# EAGLE board main (EAGLE 9.6.2)
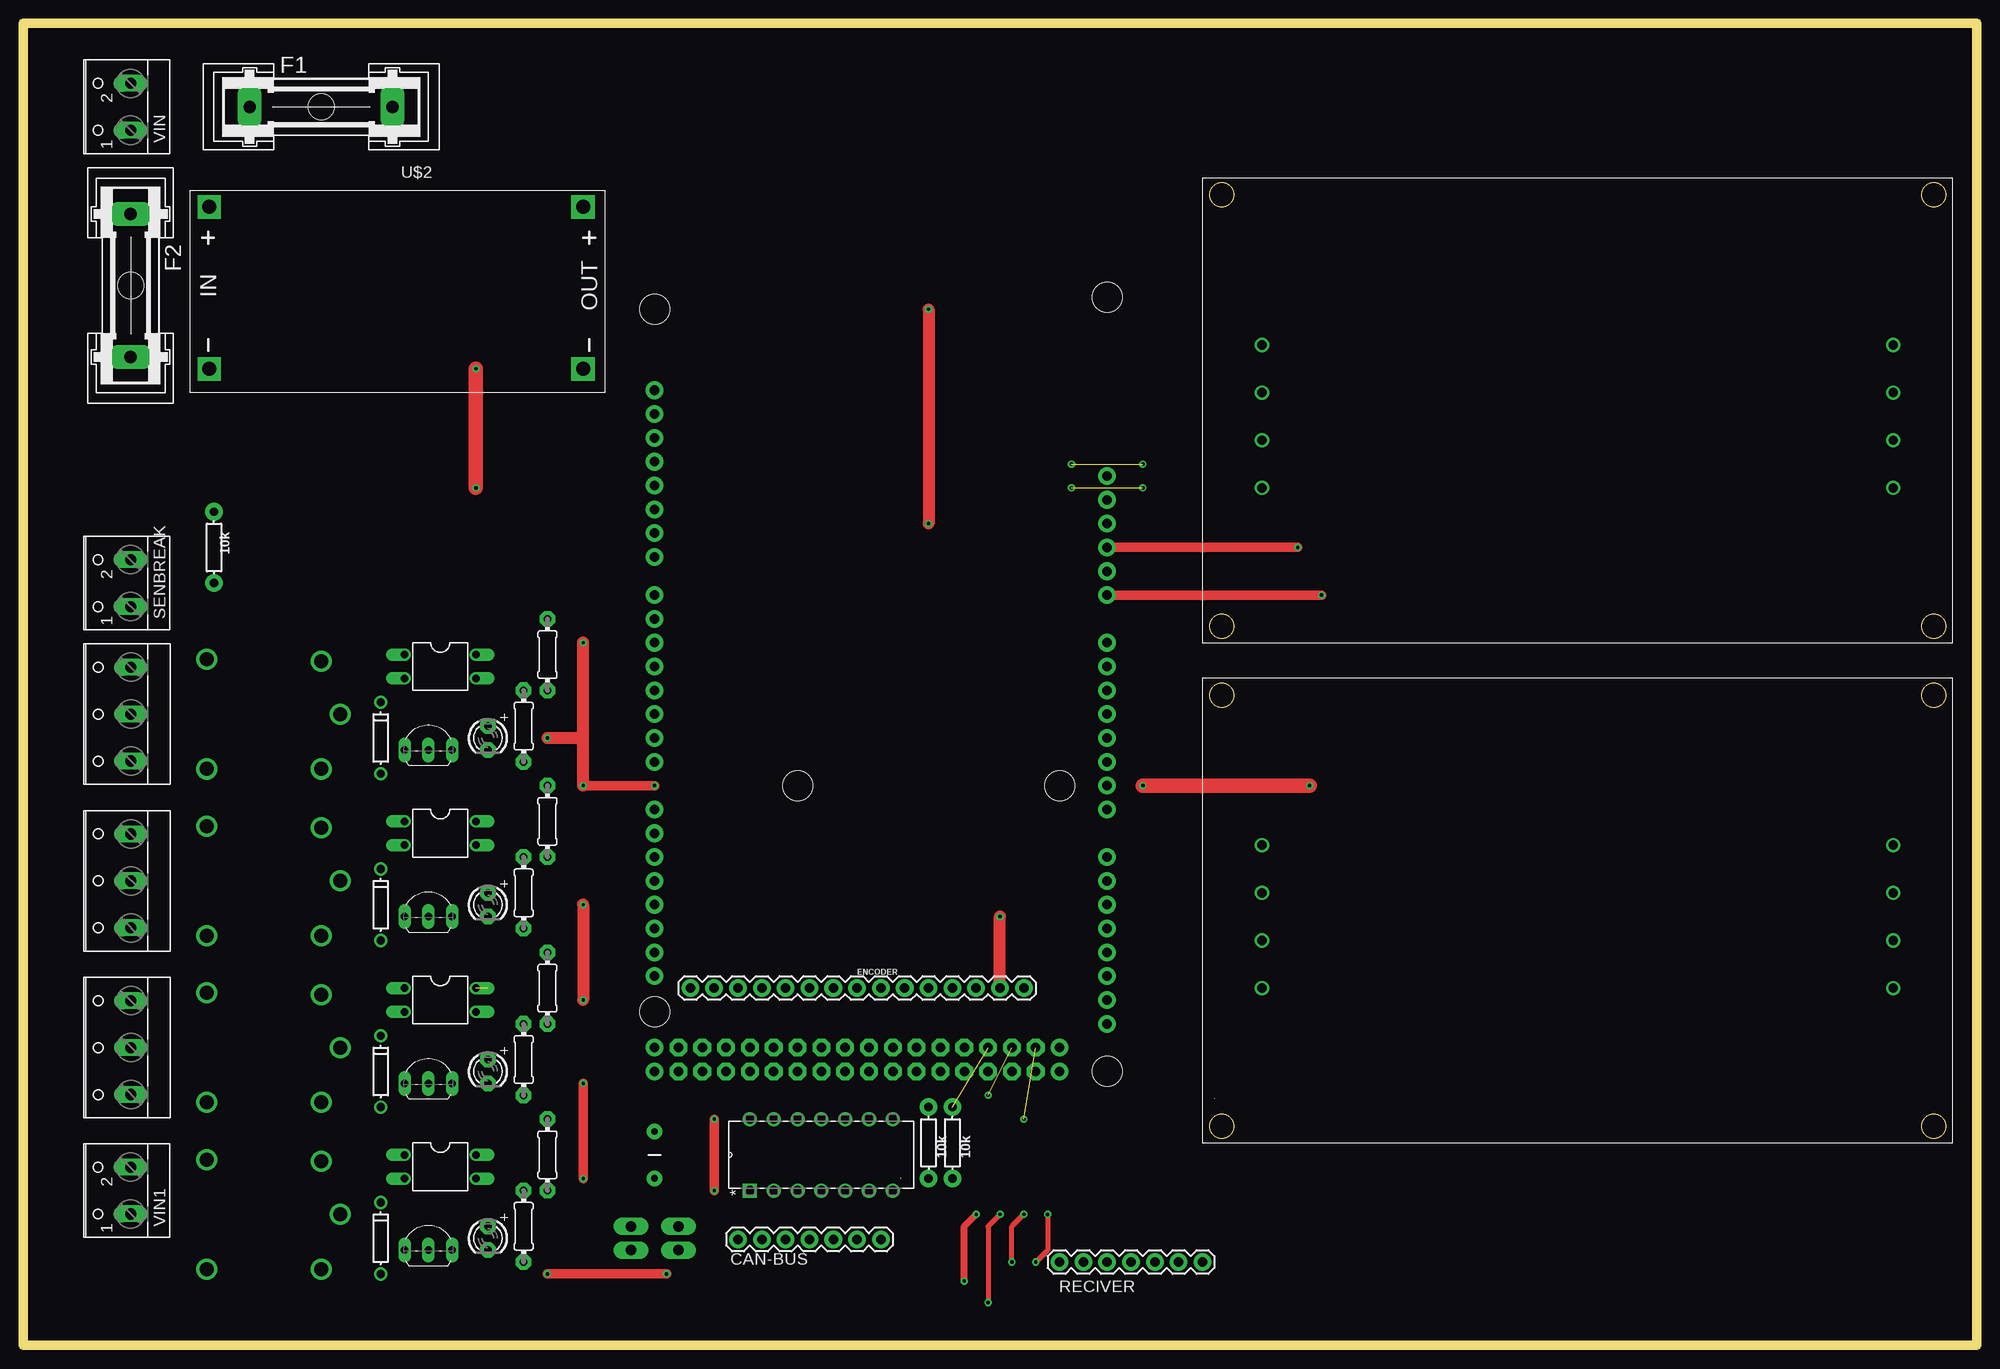
[diagram p0: board, top side]
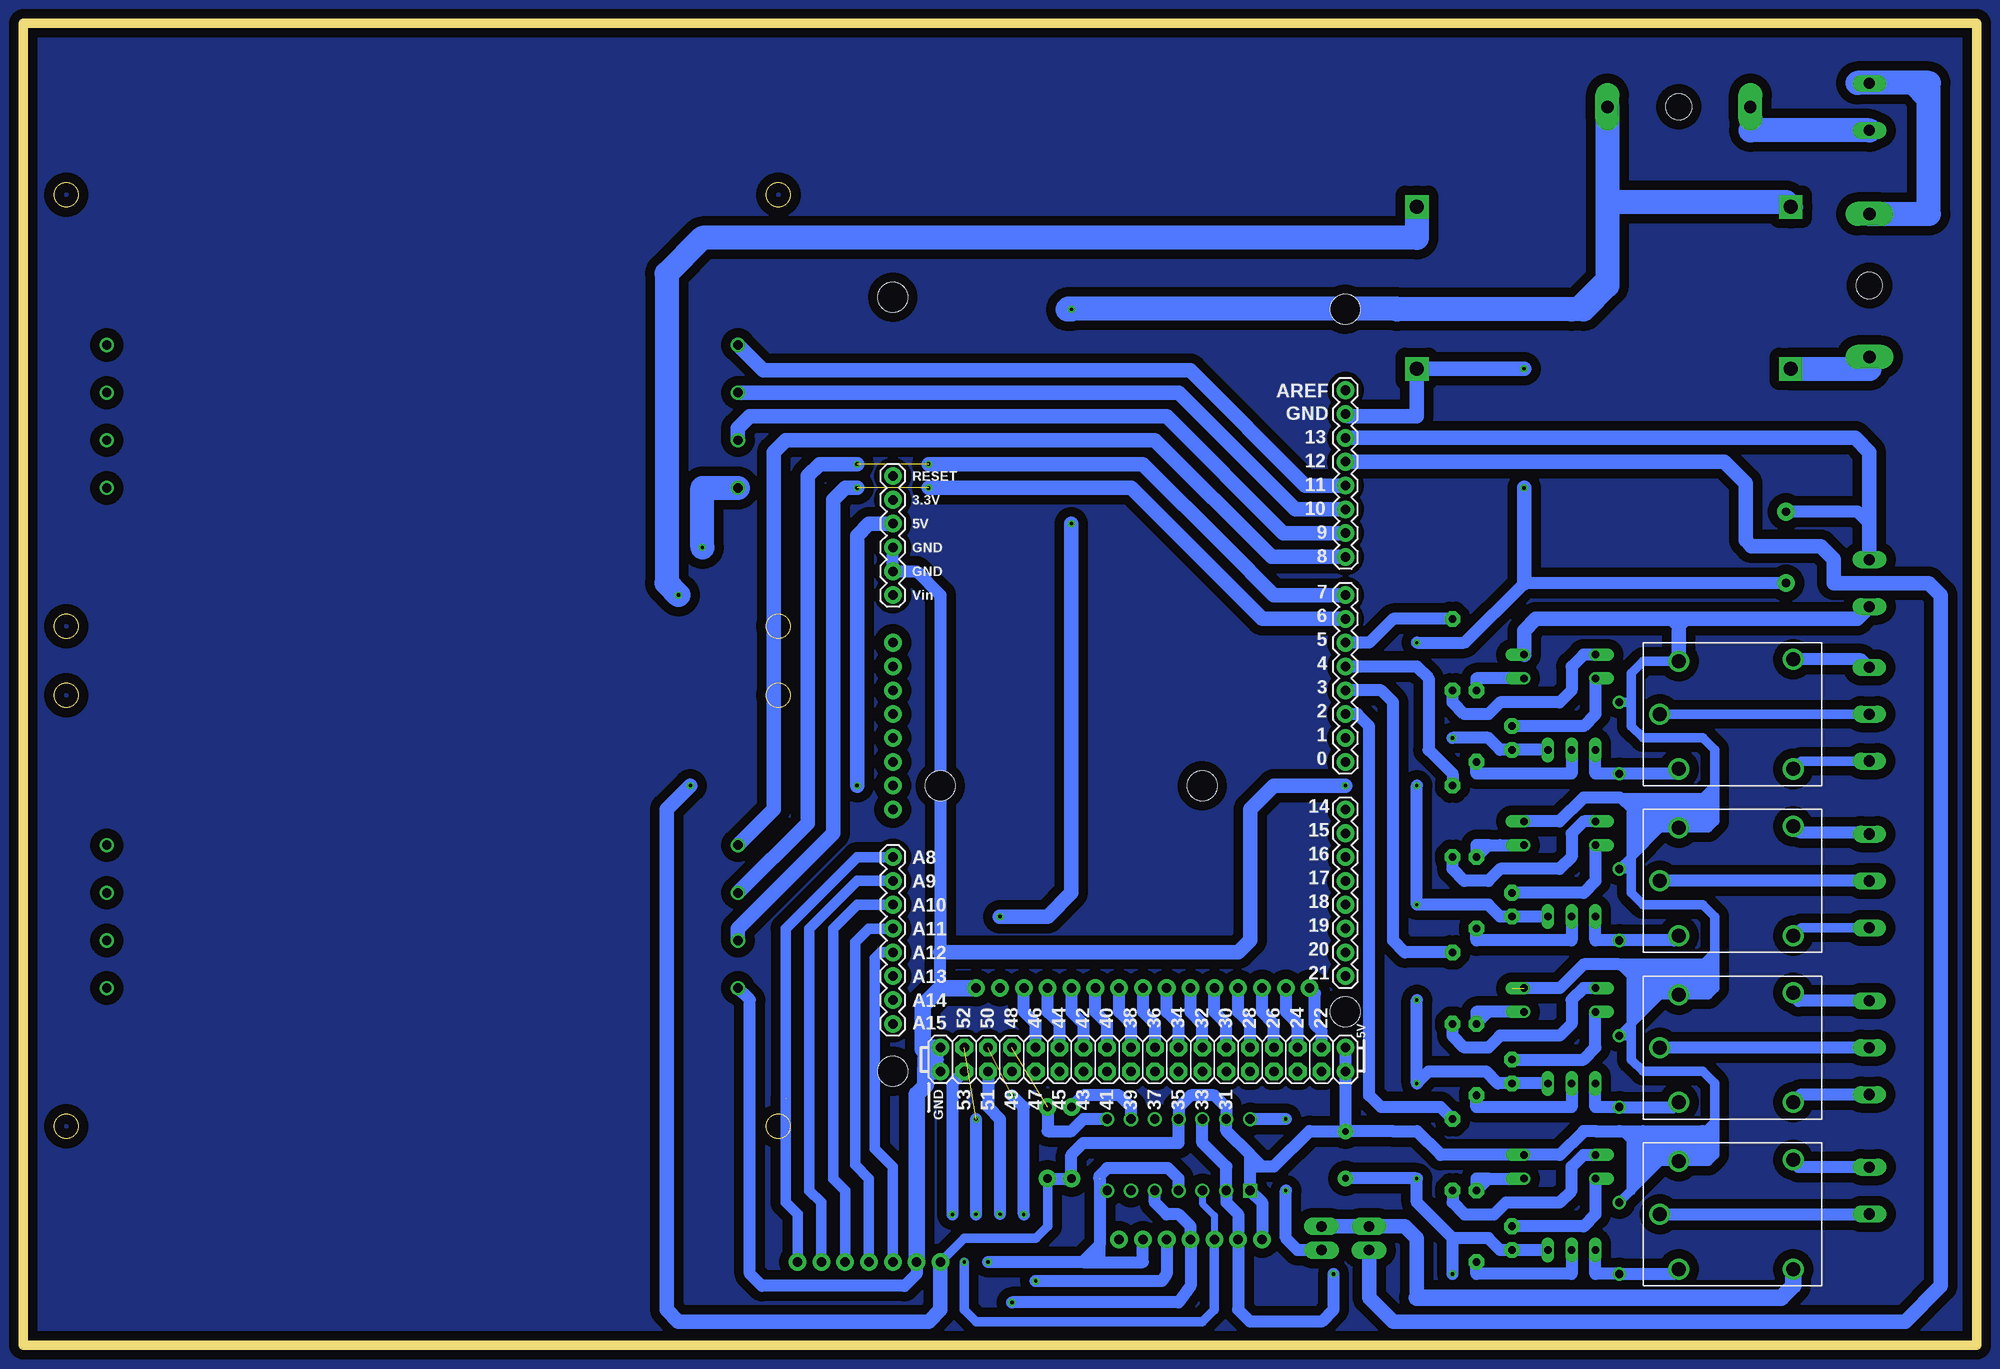
[diagram p1: board, bottom side, seen from below]

Size 208.28 x 140.97 mm. Coordinates in mm from the lower left corner, seen from the top.
Outline: 0,0 0,140.97 208.28,140.97 208.28,0 0,0
Copper layers (1*16): Top 0.035mm / dielectric 1.5mm / Bottom 0.035mm
Design rules "default": minimum track width 6mil, minimum drill 0.35mm, track to track 6mil, track to pad 6mil, pad to pad 6mil, via to via 6mil, smd to smd 6mil, copper to edge 40mil, drill to drill 6mil, minimum pad ring 10mil, minimum via ring 8mil, stop-mask expansion 4mil, vias tented up to drill 0mil, thermal gap 10mil

## Footprints (pad centres in the part's own frame; a part is rotated, then mirrored left to right if it is on the bottom)
CAP-PTH-5MM = drill 0.7 pad 1.651: 1 -2.5,0; 2 2.5,0
1X07 = drill 1.016 pad 1.88: 1 0,0; 2 2.54,0; 3 5.08,0; 4 7.62,0; 5 10.16,0; 6 12.7,0; 7 15.24,0
DO-1N4148 = drill 0.9: A -3.81,0; C 3.81,0
1X15 = drill 1.016 pad 1.88: 1 0,0; 2 2.54,0; 3 5.08,0; 4 7.62,0; 5 10.16,0; 6 12.7,0; 7 15.24,0; 8 17.78,0; 9 20.32,0; 10 22.86,0; 11 25.4,0; 12 27.94,0; 13 30.48,0; 14 33.02,0; 15 35.56,0
GSH15 = drill 1.321 pad 2.54 long: 1 -7.62,0; 2 7.62,0 | hole 2.794: 0,0
W237-103 = drill 1.194 long: 1 -5,-1.29; 2 0,-1.29; 3 5,-1.29
CQ1 = drill 1.5: 1 5.08,-5.66; 2 5.08,5.842; C 7.112,0; NC -7.112,-5.842; NO -7.112,5.842
LED3MM = drill 0.813 pad 1.676 octagon: A -1.27,0; K 1.27,0
DIL04 = drill 0.813 offset: 1 -1.27,-3.81; 2 1.27,-3.81; 3 1.27,3.81; 4 -1.27,3.81
1X02_LONGPADS = drill 1.118 pad 1.88 long: 1 0,0; 2 2.54,0
TO92-EBC = drill 0.813 long: B 0,-1.27; C -2.54,-1.27; E 2.54,-1.27
0204/7 = drill 0.813 pad 1.676 octagon: 1 -3.81,0; 2 3.81,0
AXIAL-0.3 = drill 0.9 pad 1.88: P$1 -3.81,0; P$2 3.81,0
W237-102 = drill 1.194 long: 1 -2.5,-1.27; 2 2.5,-1.27
ARDUINO_MEGA = drill 1.016 pad 1.88: 0 63.5,50.8; 1 60.96,50.8; 2 58.42,50.8; 3 55.88,50.8; 3.3V 35.56,2.54; 4 53.34,50.8; 5 50.8,50.8; 5V@0 38.1,2.54; 5V@1 93.98,50.8; 5V@2 96.52,50.8; 6 48.26,50.8; 7 45.72,50.8; 8 41.656,50.8; 9 39.116,50.8; 10 36.576,50.8; 11 34.036,50.8; 12 31.496,50.8; 13 28.956,50.8; 14 68.58,50.8; 15 71.12,50.8; 16 73.66,50.8; 17 76.2,50.8; 18 78.74,50.8; 19 81.28,50.8; 20 83.82,50.8; 21 86.36,50.8; A0 50.8,2.54; A1 53.34,2.54; A2 55.88,2.54; A3 58.42,2.54; A4 60.96,2.54; A5 63.5,2.54; A6 66.04,2.54; A7 68.58,2.54; A8 73.66,2.54; A9 76.2,2.54; A10 78.74,2.54; A11 81.28,2.54; A12 83.82,2.54; A13 86.36,2.54; A14 88.9,2.54; A15 91.44,2.54; AREF 23.876,50.8; GND@0 40.64,2.54; GND@1 43.18,2.54; GND@2 93.98,7.62; GND@3 96.52,7.62; GND@4 26.416,50.8; RESET 33.02,2.54; VIN 45.72,2.54 | drill 1.016 pad 1.88 octagon: 22 93.98,48.26; 23 96.52,48.26; 24 93.98,45.72; 25 96.52,45.72; 26 93.98,43.18; 27 96.52,43.18; 28 93.98,40.64; 29 96.52,40.64; 30 93.98,38.1; 31 96.52,38.1; 32 93.98,35.56; 33 96.52,35.56; 34 93.98,33.02; 35 96.52,33.02; 36 93.98,30.48; 37 96.52,30.48; 38 93.98,27.94; 39 96.52,27.94; 40 93.98,25.4; 41 96.52,25.4; 42 93.98,22.86; 43 96.52,22.86; 44 93.98,20.32; 45 96.52,20.32; 46 93.98,17.78; 47 96.52,17.78; 48 93.98,15.24; 49 96.52,15.24; 50 93.98,12.7; 51 96.52,12.7; 52 93.98,10.16; 53 96.52,10.16 | hole 3.2: 15.24,50.8; 13.97,2.54; 66.04,35.56; 66.04,7.62; 90.17,50.8; 96.52,2.54
DIP254P762X533-14 = drill 0.991 square: 1 -7.62,15.24 | drill 0.991: 2 -7.62,12.7; 3 -7.62,10.16; 4 -7.62,7.62; 5 -7.62,5.08; 6 -7.62,2.54; 7 -7.62,0; 8 0,0; 9 0,2.54; 10 0,5.08; 11 0,7.62; 12 0,10.16; 13 0,12.7; 14 0,15.24
DC-DC-STEP-DOWN-LM2596 = drill 1.5 pad 2.5 square: IN+ -22.098,8.382; IN- -22.098,-8.89; OUT+ 17.78,8.382; OUT- 17.78,-8.89
TLP250 = drill 1: GND 10.16,33.02; GNDS 10.16,-34.29; IN1 -5.08,-34.29; IN2 0,-34.29; M+ 0,33.02; M- 5.08,33.02; PWM 5.08,-34.29; VS+ -5.08,33.02

## Placement (x,y rotation side)
C2  0.1  [CAP-PTH-5MM]  67.31,20.32 90 top
CAN-BUS  [1X07]  76.2,11.3 0 top
D1  1N4148  [DO-1N4148]  38.1,46.99 90 top
D2  1N4148  [DO-1N4148]  38.1,64.77 90 top
D4  1N4148  [DO-1N4148]  38.1,29.21 90 top
D5  1N4148  [DO-1N4148]  38.1,11.43 90 top
ENCODER  [1X15]  71.12,38.1 0 top
F1  FUSEGSH15  [GSH15]  31.75,132.08 0 top
F2  FUSEGSH15  [GSH15]  11.43,113.03 270 top
F/B  [W237-103]  10.16,49.53 90 top
K1  CQ1-12V  [CQ1]  26.67,67.31 180 bottom
K2  CQ1-12V  [CQ1]  26.67,49.53 180 bottom
K3  CQ1-12V  [CQ1]  26.67,31.75 180 bottom
K4  CQ1-12V  [CQ1]  26.67,13.97 180 bottom
LED1  [LED3MM]  49.53,64.77 270 top
LED2  [LED3MM]  49.53,46.99 270 top
LED3  [LED3MM]  49.53,29.21 270 top
LED4  [LED3MM]  49.53,11.43 270 top
OK1  PC817  [DIL04]  44.45,54.61 270 top
OK2  PC817  [DIL04]  44.45,72.39 270 top
OK3  PC817  [DIL04]  44.45,36.83 270 top
OK4  PC817  [DIL04]  44.45,19.05 270 top
ON/OFFS  [W237-103]  10.16,67.31 90 top
PWMS1  Out1  [1X02_LONGPADS]  64.77,10.16 90 top
PWMS2  Out1  [1X02_LONGPADS]  69.85,10.16 90 top
Q1  PN2222  [TO92-EBC]  43.18,46.99 0 top
Q2  PN2222  [TO92-EBC]  43.18,64.77 0 top
Q3  PN2222  [TO92-EBC]  43.18,29.21 0 top
Q4  PN2222  [TO92-EBC]  43.18,11.43 0 top
R1  330R  [0204/7]  55.88,38.1 270 top
R2  1k  [0204/7]  53.34,30.48 270 top
R3  330R  [0204/7]  55.88,55.88 270 top
R4  10k  [AXIAL-0.3]  20.32,85.09 90 top
R5  330R  [0204/7]  55.88,20.32 270 top
R6  1k  [0204/7]  53.34,48.26 270 top
R7  330R  [0204/7]  55.88,73.66 270 top
R8  1k  [0204/7]  53.34,66.04 270 top
R10  1k  [0204/7]  53.34,12.7 270 top
R12  10k  [AXIAL-0.3]  96.52,21.59 270 top
R13  10k  [AXIAL-0.3]  99.06,21.59 270 top
RECIVER  [1X07]  110.49,8.89 0 top
SELECTS  [W237-103]  10.16,31.75 90 top
SENBREAK  Vcc  [W237-102]  10.16,81.28 90 top
U1  ARDUINO-MEGAFULL  [ARDUINO_MEGA]  118.11,125.73 270 bottom
U$1  MCP4922-E/P  [DIP254P762X533-14]  92.71,24.13 90 top
U$2  DC-DC-STEP-DOWN-LM2596  [DC-DC-STEP-DOWN-LM2596]  41.91,113.03 0 top
U$3  [TLP250]  166.37,48.26 270 top
U$4  [TLP250]  166.37,101.6 270 top
VIN  -  [W237-102]  10.16,132.08 90 top
VIN1  -  [W237-102]  10.16,16.51 90 top

## Library data of the parts
C2 R4 R12 R13 = SparkFun-Passives
CAN-BUS RECIVER = SparkFun
D1 D2 D4 D5 LED1-LED4 R1-R3 R5-R8 R10 = adafruit
ENCODER PWMS1 PWMS2 = SparkFun-Connectors
F1 F2 = fuse; OC_FARNELL: unknown; OC_NEWARK: unknown
F/B ON/OFFS SELECTS = con-wago-500; MPN: 237-103; OC_FARNELL: unknown; OC_NEWARK: 18M7116
K1-K4 = relay5vdc; OC_FARNELL: unknown; OC_NEWARK: unknown
OK1-OK4 = optocoupler; MPN: PC817X4J000F; OC_FARNELL: 9707727; OC_NEWARK: 97K7059
Q1-Q4 = transistor-npn
SENBREAK VIN VIN1 = con-wago-500; MPN: 237-102; OC_FARNELL: unknown; OC_NEWARK: 70K9898
U1 = SparkFun-Boards
U$1 = Microchip_By_element14_Batch_1; MPN: MCP4922-E/P; OC_FARNELL: 1292244; OC_NEWARK: 61K2950; PACKAGE: DIP-14; SUPPLIER: Microchip
U$2 = diy-modules
U$3 U$4 = TLP250

## Nets
3: D4.A K3.2 Q3.C
6: D5.A K4.2 Q4.C
22: D2.A K1.2 Q2.C
!CS: CAN-BUS.3 U1.53 U$1.3
!SHDN: R12.P$1 U$1.9
A8: RECIVER.7 U1.A8
A9: RECIVER.6 U1.A9
A10: RECIVER.5 U1.A10
A11: RECIVER.4 U1.A11
A12: RECIVER.3 U1.A12
D6PWM: U1.6 U$3.PWM
D7PWM: U1.7 U$3.IN2
D8PWM: U1.8 U$3.IN1
D9PWM: U1.9 U$4.PWM
D10PWM: U1.10 U$4.IN2
D11PWM: U1.11 U$4.IN1
D12PWM: PWMS1.1 U1.12
D13PWM: R4.P$2 SENBREAK.2 U1.13
D22: ENCODER.1 U1.22
D24: ENCODER.2 U1.24
D26: ENCODER.3 U1.26
D28: ENCODER.4 U1.28
D30: ENCODER.5 U1.30
D32: ENCODER.6 U1.32
D34: ENCODER.7 U1.34
D36: ENCODER.8 U1.36
D38: ENCODER.9 U1.38
D40: ENCODER.10 U1.40
D42: ENCODER.11 U1.42
D44: ENCODER.12 U1.44
D46: ENCODER.13 U1.46
D48: R13.P$1 U1.48 U$1.8
GND: C2.1 CAN-BUS.2 ENCODER.15 LED1.K LED2.K LED3.K LED4.K Q1.E Q2.E Q3.E Q4.E R4.P$1 RECIVER.2 U1.GND@0 U1.GND@1 U1.GND@2 U1.GND@3 U1.GND@4 U$1.2 U$1.12 U$2.OUT- U$3.GNDS U$4.GNDS
GND-: D1.A K2.2 Q1.C
IN1: R7.1 U1.5
IN2: R3.1 U1.4
IN3: R1.1 U1.3
IN4: R5.1 U1.2
INS: OK1.1 R3.2
INSS: OK2.1 R7.2
INSS1: OK3.1 R1.2
INSS2: OK4.1 R5.2
LED: LED2.A OK1.2
LEDS: LED1.A OK2.2
LEDS1: LED3.A OK3.2
LEDS2: LED4.A OK4.2
MISO: CAN-BUS.5 U1.50
MOSI: CAN-BUS.4 U1.51 U$1.5
N$1: K4.NO PWMS1.2 PWMS2.2
N$2: K1.NO ON/OFFS.1
N$3: K1.C ON/OFFS.2
N$4: F/B.1 K2.NO
N$5: F/B.2 K2.C
N$6: Q3.B R2.2
N$7: OK3.3 R2.1
N$8: K3.NO SELECTS.1
N$9: K3.C SELECTS.2
N$10: Q4.B R10.2
N$11: OK4.3 R10.1
N$12: Q1.B R6.2
N$14: K4.C VIN1.1
N$15: K1.NC ON/OFFS.3
N$16: F/B.3 K2.NC
N$17: K3.NC SELECTS.3
N$18: K4.NC VIN1.2
N$20: Q2.B R8.2
N$22: OK2.3 R8.1
N$24: F1.1 VIN.1
N$25: F2.2 U$2.IN-
N$26: F2.1 VIN.2
OTP: OK1.3 R6.1
S1: PWMS2.1 U$1.14
S2: U$1.10
SCK: CAN-BUS.6 U1.52 U$1.4
VCC: C2.2 CAN-BUS.1 D1.C D2.C D4.C D5.C K1.1 K2.1 K3.1 K4.1 OK1.4 OK2.4 OK3.4 OK4.4 R12.P$2 R13.P$2 RECIVER.1 SENBREAK.1 U1.5V@0 U1.5V@1 U1.5V@2 U$1.1 U$1.11 U$1.13
VIN: ENCODER.14 F1.2 U$2.IN+
VINS: U1.VIN U$2.OUT+

## Tracks (layer width: path | path; a pad name or v marks a point on that pad's centre or on a via)
3
  Bottom 1.27: Q3.C 40.64,25.4 D4.A 32.26,25.4 K3.2
6
  Bottom 1.27: Q4.C 40.64,7.62 D5.A 32.26,7.62 K4.2
22
  Bottom 1.27: K1.2 32.26,60.96 D2.A 40.64,60.96 Q2.C
!CS  (via drill 0.35)
  Top 0.508: v109.22,13.97 109.22,10.16 v107.95,8.89
  Bottom 0.762: U$1.3 82.55,15.11 81.28,13.84 CAN-BUS.3
  Bottom 1.016: CAN-BUS.3 81.28,3.81 82.55,2.54 106.68,2.54 107.95,3.81 v107.95,8.89
  Bottom 1.27: U1.53 109.22,27.94 v109.22,13.97
!SHDN
  Bottom 1.27: U$1.9 90.17,25.4 91.44,26.67 95.25,26.67 R12.P$1
A8  (1 unrouted)
  Bottom 1.143: U1.A8 119.38,52.07 127,44.45 127,26.29 | RECIVER.7 125.73,13.97 127,15.24 127,26.35
A9
  Bottom 1.143: RECIVER.6 123.19,15.24 124.46,16.51 124.46,44.45 119.38,49.53 U1.A9
A10
  Bottom 1.143: U1.A10 119.38,46.99 121.92,44.45 121.92,17.78 120.65,16.51 RECIVER.5
A11
  Bottom 1.143: RECIVER.4 118.11,17.78 119.59,19.26 119.59,42.97 118.11,44.45 U1.A11
A12
  Bottom 1.143: U1.A12 116.84,41.91 117.47,41.27 117.47,20.95 115.57,19.05 RECIVER.3
B
  pour Bottom (isolate 1.016, rank 6): -3.81,143.51 -3.81,-3.81 212.09,-3.81 212.09,143.51
D6PWM  (via drill 0.35)  (1 unrouted)
  Bottom 1.524: v119.38,91.44 120.65,91.44 121.92,90.17 121.92,54.61 132.08,44.45 U$3.PWM | U1.6 76.2,77.47 90.17,91.44 v111.76,91.44
D7PWM  (via drill 0.35)  (1 unrouted)
  Bottom 1.524: U$3.IN2 124.65,55.69 124.65,92.71 123.38,93.98 v119.38,93.98 | U1.7 74.93,80.01 80.01,85.09 88.9,93.98 v111.76,93.98
D8PWM
  Bottom 1.524: U$3.IN1 128.25,57.17 128.25,95.27 127,96.52 87.63,96.52 75.18,84.07 U1.8
D9PWM
  Bottom 1.524: U$4.PWM 132.08,97.79 130.81,99.06 86.36,99.06 73.91,86.61 U1.9
D10PWM
  Bottom 1.524: U$4.IN2 85.09,101.6 72.64,89.15 U1.10
D11PWM
  Bottom 1.524: U1.11 71.58,91.69 83.87,103.99 129.39,103.99 U$4.IN1
D12PWM
  Bottom 1.524: PWMS1.1 64.77,5.08 62.23,2.54 7.62,2.54 3.81,6.35 3.81,80.01 5.08,81.28 15.24,81.28 15.24,83.82 16.64,85.22 24,85.22 24.64,85.85 24.64,91.95 26.92,94.23 U1.12
D13PWM
  Bottom 1.27: SENBREAK.2 11.43,87.63 12.7,88.9 R4.P$2
  Bottom 1.524: U1.13 12.95,96.77 11.43,95.25 SENBREAK.2
D22
  Bottom 1.27: U1.22 69.85,33.5 70.56,34.21 70.56,37.54 ENCODER.1
D24
  Bottom 1.27: U1.24 72.39,34.29 73.66,35.56 ENCODER.2
D26
  Bottom 1.27: ENCODER.3 76.2,35.56 74.93,34.29 U1.26
D28
  Bottom 1.27: U1.28 77.47,33.02 77.47,34.29 78.74,35.56 ENCODER.4
D30
  Bottom 1.27: U1.30 80.01,34.29 81.28,35.56 ENCODER.5
D32
  Bottom 1.27: U1.32 82.55,34.29 83.82,35.56 ENCODER.6
D34
  Bottom 1.27: U1.34 85.09,34.29 86.36,35.56 ENCODER.7
D36
  Bottom 1.27: ENCODER.8 88.9,35.56 87.63,34.29 U1.36
D38
  Bottom 1.27: U1.38 90.17,34.29 91.44,35.56 ENCODER.9
D40
  Bottom 1.27: U1.40 92.71,34.29 93.98,35.56 ENCODER.10
D42
  Bottom 1.27: ENCODER.11 96.52,35.56 95.25,34.29 U1.42
D44
  Bottom 1.27: U1.44 97.79,34.29 99.06,35.56 ENCODER.12
D46
  Bottom 1.27: U1.46 100.33,34.29 101.6,35.56 ENCODER.13
D48  (1 unrouted)
  Bottom 1.27: R13.P$1 99.06,22.86 96.52,22.86 95.25,24.13 U$1.8
GND  (via drill 0.35)
  Top 0.762: 116.84,85.09 v135.89,85.09
  Top 1.016: U1.GND@0 v135.89,85.09 | v59.69,59.69 v67.31,59.69 | v59.69,17.78 v59.69,27.94 | v55.88,7.62 v68.58,7.62
  Top 1.27: v59.69,46.99 v59.69,36.83 | v59.69,59.69 59.69,64.77 | v55.88,64.77 59.69,64.77 | 59.69,64.77 v59.69,74.93
  Top 1.524: v48.26,91.44 v48.26,104.14
  Bottom 0.762: 112.57,36.02 112.57,31.75 111.76,31.75 | 110.49,30.48 U1.GND@2 111.76,31.75 | 110.49,30.48 111.76,30.48 | 129.82,6.63 114.02,6.63 113.03,7.62 | RECIVER.2 112.57,9.35 112.57,29.21 | 112.57,29.67 112.57,30.48 111.76,30.48 | U1.GND@3 111.76,29.21 112.06,29.21 112.57,29.21 | 111.76,30.48 111.76,31.75 | U1.GND@3 110.49,30.48 | 110.49,30.48 111.76,31.75 | U1.GND@3 110.49,29.67 111.53,30.71 | U1.GND@3 111.76,30.48 | 112.57,29.21 112.57,29.67 | 112.57,29.67 111.76,30.48
  Bottom 1.27: RECIVER.2 113.03,7.62 114.3,6.35 129.54,6.35 129.82,6.63 130.81,7.62 130.81,36.83 U$3.GNDS | U$1.12 82.55,21.59 80.01,19.05 U$1.2 80.01,15.24 78.74,13.97 CAN-BUS.2 78.74,3.81 77.47,2.54 69.85,2.54 68.58,3.81 v68.58,7.62 | 55.88,11.43 52.07,11.43 50.8,10.16 LED4.K Q4.E | v55.88,7.62 55.88,11.43 | 55.88,11.43 59.69,15.24 v59.69,17.78 59.73,17.82 C2.1 | Q3.E LED3.K 51.04,27.94 52.31,29.21 58.42,29.21 v59.69,27.94 v59.69,36.83 | Q1.E LED2.K 50.8,45.72 52.07,46.99 v59.69,46.99 v59.69,59.69 | Q2.E LED1.K 50.8,63.5 52.07,64.77 v55.88,64.77 | v59.69,74.93 54.61,74.93 48.26,81.28 R4.P$1 | 110.49,38.1 110.49,41.91 110.49,80.01 113.03,82.55 U1.GND@1 U1.GND@0
  Bottom 1.524: v67.31,59.69 74.93,59.69 77.47,57.15 77.47,43.18 78.74,41.91 110.49,41.91 | v48.26,104.14 U$2.OUT- 59.69,99.06 67.06,99.06 U1.GND@4 | 48.26,81.28 v48.26,91.44
  Bottom 1.778: ENCODER.15 110.49,38.1 112.39,36.2 112.39,31.57 | 112.39,31.57 111.53,30.71 | 111.76,29.21 111.76,30.48 U1.GND@2 112.22,31.75 112.39,31.57 | 112.06,30.66 112.06,29.21 | 112.06,29.21 112.06,27.76 113.03,26.79 RECIVER.2 | U1.GND@3 112.06,29.21
  Bottom 2.54: v135.89,85.09 135.89,91.44 U$4.GNDS
GND-
  Bottom 1.27: Q1.C 40.64,43.18 D1.A 32.26,43.18 K2.2
IN1
  Bottom 1.27: R7.1 62.23,77.47 64.77,74.93 U1.5
IN2
  Bottom 1.27: R3.1 55.88,60.96 58.42,63.5 58.42,71.12 59.69,72.39 U1.4
IN3
  Bottom 1.27: R1.1 60.96,41.91 62.23,43.18 62.23,68.58 63.5,69.85 U1.3
IN4
  Bottom 1.27: R5.1 57.15,25.4 63.5,25.4 64.77,26.67 64.77,66.04 66.04,67.31 U1.2
INS
  Bottom 1.27: OK1.1 41.91,55.88 43.18,54.61 43.18,52.07 44.45,50.8 50.8,50.8 52.07,49.53 54.61,49.53 55.88,50.8 R3.2
INSS
  Bottom 1.27: OK2.1 41.91,73.66 43.18,72.39 43.18,69.85 44.45,68.58 50.8,68.58 52.07,67.31 54.61,67.31 55.88,68.58 R7.2
INSS1
  Bottom 1.27: OK3.1 41.91,38.1 43.18,36.83 43.18,34.29 44.45,33.02 50.8,33.02 52.07,31.75 54.61,31.75 55.88,33.02 R1.2
INSS2
  Bottom 1.27: R5.2 55.88,15.24 54.61,13.97 51.44,13.97 50.8,14.61 50.16,15.24 44.45,15.24 43.18,16.51 43.18,19.05 41.91,20.32 OK4.1
LED
  Bottom 1.27: LED2.A 41.91,48.26 40.64,49.53 OK1.2
LEDS
  Bottom 1.27: OK2.2 40.64,67.31 41.91,66.04 LED1.A
LEDS1
  Bottom 1.27: LED3.A 41.91,30.48 40.64,31.75 OK3.2
LEDS2
  Bottom 1.27: OK4.2 40.64,13.97 41.91,12.7 LED4.A
MISO  (via drill 0.35)  (1 unrouted)
  Top 0.762: v100.33,6.86 100.33,12.7 v101.6,13.97
  Bottom 1.27: v101.6,13.97 101.6,25.4 v102.87,26.67 | CAN-BUS.5 86.36,7.62 86.87,6.86 v100.33,6.86
MOSI  (via drill 0.35)
  Top 0.508: v104.15,13.98 102.87,12.7 v102.87,4.57
  Bottom 0.508: v104.14,13.99 v104.15,13.98
  Bottom 1.27: U1.51 105.41,25.4 104.14,24.13 v104.14,13.99 | v102.87,4.57 85.09,4.57 83.82,6.35 CAN-BUS.4 83.82,12.7 85.09,13.97 86.36,13.97 87.63,15.24 U$1.5
N$1
  Bottom 1.524: PWMS2.2 PWMS1.2 60.96,12.7 59.69,11.43 59.69,5.08
  Bottom 1.778: K4.NO 19.56,6.35 20.83,5.08 59.69,5.08
N$2
  Bottom 1.016: ON/OFFS.1 18.72,62.31 K1.NO
N$3
  Bottom 1.016: ON/OFFS.2 K1.C
N$4
  Bottom 1.016: F/B.1 18.72,44.53 K2.NO
N$5
  Bottom 1.016: F/B.2 K2.C 34.29,49.53
  Bottom 1.27: F/B.2 34.29,49.53
N$6
  Bottom 1.27: Q3.B 43.18,25.4 53.34,25.4 R2.2
N$7
  Bottom 1.27: OK3.3 52.07,35.56 | 52.07,35.56 R2.1 53.34,35.56 52.07,35.56
N$8
  Bottom 1.27: SELECTS.1 18.72,26.75 K3.NO
N$9
  Bottom 1.016: SELECTS.2 K3.C 34.29,31.75
  Bottom 1.27: SELECTS.2 34.29,31.75
N$10
  Bottom 1.27: Q4.B 43.18,7.62 53.34,7.62 R10.2
N$11
  Bottom 1.27: 52.07,17.78 R10.1 53.34,17.78 52.07,17.78 | 52.07,17.78 OK4.3
N$12
  Bottom 1.27: Q1.B 43.18,43.18 53.34,43.18 R6.2
N$14
  Bottom 1.27: K4.C 11.47,13.97 VIN1.1
N$15
  Bottom 1.27: ON/OFFS.3 12.29,73.15 K1.NC
N$16
  Bottom 1.27: F/B.3 11.66,54.74 18.92,54.74 K2.NC
N$17
  Bottom 1.27: SELECTS.3 18.97,36.75 19.56,37.34 K3.NC
N$18
  Bottom 1.27: K4.NC 19.56,19.56 19.01,19.01 VIN1.2
N$20
  Bottom 1.27: Q2.B 43.18,60.96 53.34,60.96 R8.2
N$22
  Bottom 1.27: OK2.3 53.34,71.12 R8.1
N$24
  Bottom 1.524: VIN.1 21.55,129.58 | 21.59,129.54 21.55,129.58 | 21.55,129.58 24.09,129.58 | 24.09,129.58 24.13,129.54 | F1.1 24.13,129.62 24.09,129.58
  Bottom 2.54: VIN.1 24.09,129.58
N$25
  Bottom 1.524: 11.43,104.14 F2.2
  Bottom 2.54: U$2.IN- 11.43,104.14
N$26
  Bottom 0.762: 5.08,127 5.08,130.81
  Bottom 1.27: F2.1 6.35,120.65 5.08,121.92 5.08,130.81 5.08,132.08 7.62,134.62 11.39,134.62 VIN.2
  Bottom 2.54: F2.1 5.08,120.65 5.08,134.62 12.7,134.62
OTP
  Bottom 1.27: 52.07,53.34 50.8,53.34 OK1.3 | 52.07,53.34 R6.1 53.34,53.34 52.07,53.34
S1  (via drill 0.35)
  Top 1.016: v73.66,24.13 v73.66,16.51
  Bottom 1.27: v73.66,24.13 U$1.14 | PWMS2.1 72.39,10.16 73.66,11.43 v73.66,16.51
SCK  (via drill 0.35)  (2 unrouted)
  Top 0.508: v105.41,8.89 105.41,12.7 v106.69,13.98
  Bottom 1.27: v106.69,13.98 v106.69,24.12 v106.68,24.13 | U$1.4 85.09,17.78 86.21,18.9 92.71,18.9 93.52,18.09 93.52,17.87 93.57,17.82 | 93.52,17.78 93.52,10.71 | 93.52,10.71 95.25,8.99 95.25,8.89 | 95.25,8.89 v105.41,8.89 | 95.25,8.89 93.98,8.89 | 93.98,8.89 88.9,8.89 CAN-BUS.6 | 93.98,8.89 93.52,9.35 93.52,10.71
VCC  (via drill 0.35)  (1 unrouted)
  Top 1.524: v119.38,59.69 v137.16,59.69
  Bottom 0.508: 30.48,46.99 35.56,46.99 | 49.53,20.32 57.15,20.32 | K2.1 32.09,55.53 34.98,58.42 35.56,58.42 | 36.83,21.59 37.47,22.23 | 37.47,22.23 38.1,22.86 | 29.21,22.86 28.57,23.5 | 28.57,23.5 27.94,24.13 | D5.C 36.83,16.51 | 37.47,22.23 36.83,22.86 | 31.75,22.86 31.75,20.32 K4.1 | 28.57,23.5 27.94,22.86
  Bottom 0.762: 27.94,22.86 27.94,24.13 27.94,27.94 | 34.29,39.37 31.75,39.37 | 30.48,39.37 31.75,39.37 | K3.1 31.75,39.37 | 46.99,77.47 33.02,77.47 | 33.02,77.47 31.75,77.47 | 31.75,77.47 30.48,77.47 | 30.48,77.47 12.7,77.47 | 31.75,76.2 31.75,77.47 | 30.48,77.47 31.75,76.2 | 31.75,76.2 33.02,77.47
  Bottom 1.016: 29.21,22.86 27.94,22.86 29.21,21.59 | 29.21,22.86 30.48,22.86 | 30.48,22.86 31.75,22.86 | 31.75,22.86 33.02,22.86 | 33.02,22.86 35.56,22.86 | 35.56,22.86 36.83,22.86 | 36.83,22.86 38.1,22.86 40.64,22.86 | OK4.4 49.53,20.32 | 36.83,16.51 36.83,17.78 | 36.83,17.78 36.83,19.05 | 36.83,19.05 36.83,20.32 | 36.83,20.32 36.83,21.59 | 36.83,21.59 36.83,22.86 | D5.C 33.71,19.63 K4.1 28.63,19.63 27.94,20.32 | 27.94,21.59 27.94,20.32 | 27.94,21.59 27.94,27.94 29.21,29.21 35.56,29.21 36.83,30.48 36.83,33.02 | 27.94,21.59 29.21,21.59 | 29.21,21.59 36.83,21.59 | 27.94,20.32 29.21,20.32 | 29.21,20.32 30.48,20.32 | 30.48,20.32 31.75,20.32 | 31.75,20.32 33.02,20.32 | 33.02,20.32 34.29,20.32 | 34.29,20.32 36.83,20.32 | 34.29,20.32 36.83,17.78 | 31.75,22.86 34.29,20.32 | 33.02,22.86 33.66,22.23 | 33.66,22.23 36.83,19.05 | 33.66,22.23 34.92,22.23 36.83,20.32 | 35.56,22.86 36.83,21.59 | 30.48,22.86 33.02,20.32 | 29.21,22.86 31.75,20.32 | 29.21,21.59 30.48,20.32 | 27.94,21.59 29.21,20.32 | 36.83,33.02 D4.C 33.71,37.41 K3.1 | 36.83,40.64 38.1,40.64 36.83,39.37 | 36.83,33.02 36.83,35.56 | 36.83,35.56 36.83,36.83 | 36.83,36.83 36.83,38.1 | 36.83,39.37 36.83,38.1 | 36.83,39.37 36.83,40.64 | 27.94,39.37 29.21,39.37 | 29.21,39.37 30.48,39.37 | 30.48,39.37 34.29,39.37 | 34.29,39.37 36.83,39.37 | 27.94,39.37 27.94,40.64 | 27.94,40.64 27.94,41.91 | 27.94,41.91 27.94,45.72 29.21,46.99 35.56,46.99 36.83,48.26 36.83,50.8 | 36.83,50.8 D1.C 36.83,52.07 | 35.56,40.64 36.83,40.64 | 36.83,39.37 35.56,40.64 | 35.56,40.64 34.29,40.64 | 34.29,40.64 33.02,40.64 | 33.02,40.64 31.75,40.64 | 31.75,40.64 30.48,40.64 | 30.48,40.64 29.21,40.64 | 29.21,40.64 28.52,40.64 | 36.83,36.83 35.56,38.1
  Bottom 1.016: 35.56,38.1 34.29,39.37 | K3.1 28.63,37.41 27.94,38.1 | 27.94,39.37 27.94,38.1 | 27.94,38.1 29.21,38.1 | 29.21,38.1 33.02,38.1 | 33.02,38.1 35.56,38.1 | 33.02,39.37 31.75,40.64 | 36.83,35.56 34.92,37.47 | 34.92,37.47 33.02,39.37 | 33.02,39.37 33.02,40.64 | 36.83,38.1 35.56,38.1 | 34.29,39.37 33.02,40.64 | 36.83,38.1 34.29,40.64 | 34.92,37.47 33.66,37.47 33.02,38.1 | 30.82,40.3 30.48,40.64 | 29.21,39.95 29.21,40.64 | 30.48,39.37 30.48,40.64 | 29.21,39.95 28.86,40.3 | 28.86,40.3 28.52,40.64 | 28.52,40.64 27.94,40.64 | 29.21,38.1 27.94,39.37 | K3.1 31.17,37.41 29.21,39.37 | K3.1 29.21,39.95 | 28.86,40.3 30.82,40.3 | 30.82,40.3 33.02,38.1 | K3.1 31.75,38.1 30.48,39.37 | 27.94,40.64 29.21,39.37 | 27.94,38.1 29.21,39.37 | 36.83,50.8 36.83,52.07 | 36.83,52.07 36.83,53.34 | 36.83,53.34 36.83,54.61 | 36.83,54.61 36.83,55.88 | 36.83,57.15 36.83,58.42 | 36.83,58.42 38.1,58.42 36.83,57.15 | K2.1 33.71,55.19 | 33.71,55.19 36.83,52.07 | K2.1 28.63,55.19 27.94,55.88 | 27.94,55.88 27.94,57.15 | 27.94,57.15 27.94,58.42 | 27.94,58.42 27.94,59.69 | 27.94,59.69 27.94,63.5 29.21,64.77 35.56,64.77 36.83,66.04 36.83,68.58 | 27.94,55.88 29.21,55.88 | 29.21,55.88 30.48,55.88 | 30.48,55.88 33.02,55.88 | 33.02,55.88 36.83,55.88 | 29.21,57.15 30.48,57.15 | 30.48,57.15 36.83,57.15 | 27.94,58.42 29.21,58.42 | 29.21,58.42 30.48,58.42 | 31.75,58.42 30.48,58.42 | 31.75,58.42 33.02,58.42 | 33.02,58.42 34.29,58.42 | 34.29,58.42 35.56,58.42 | 35.56,58.42 36.83,58.42 | 33.71,55.19 33.02,55.88 | 36.83,53.34 33.02,57.15 | 33.02,57.15 33.02,58.42 | 36.83,54.61 33.02,58.42 | 36.83,55.88 34.29,58.42 | 36.83,55.88 36.83,57.15 | 36.83,57.15 35.56,58.42 | 33.02,55.88 33.02,57.15 | 33.02,57.15 31.75,58.42
  Bottom 1.016: 33.02,55.88 31.75,57.15 | K2.1 31.75,57.15 | 31.75,57.15 30.48,58.42 | K2.1 29.21,57.73 29.21,58.42 | 29.21,57.15 27.94,58.42 | 30.48,55.88 29.21,57.15 | 29.21,57.15 27.94,57.15 | 29.21,55.88 27.94,57.15 | 30.48,58.42 30.48,57.15 | 30.48,57.15 32.09,55.53 | 29.21,58.42 30.48,57.15 | 27.94,59.69 29.21,58.42 | 27.94,41.91 29.21,40.64 | 29.21,39.95 29.21,39.37 | K1.1 35.56,72.97 36.83,71.7 36.83,68.58 | 36.83,68.58 D2.C | R13.P$2 99.06,12.7 100.33,11.43 107.95,11.43 RECIVER.1 110.49,5.08 | 132.08,2.54 111.76,2.54
  Bottom 1.27: C2.2 U1.5V@2 U1.5V@1 | 77.47,19.05 U$1.1 76.2,15.24 CAN-BUS.1 | 77.47,19.05 77.47,20.32 | 76.2,19.05 77.47,20.32 | R13.P$2 R12.P$2 96.52,20.32 95.25,21.59 85.09,21.59 U$1.11 85.09,25.4 83.82,26.67 81.28,26.67 80.01,25.4 U$1.13 80.01,22.86 77.47,20.32 | C2.2 62.19,22.82 62.23,22.86 59.69,22.86 57.15,20.32 OK4.4 44.45,20.32 41.91,22.86 40.64,22.86 35.56,22.86 | C2.2 67.35,22.86 71.12,22.86 74.93,19.05 76.2,19.05 | 76.2,19.05 77.47,19.05 | 49.53,38.1 44.45,38.1 41.91,40.64 38.1,40.64 29.21,40.64 | 38.1,58.42 41.91,58.42 44.45,55.88 OK1.4 | 38.1,22.86 29.21,22.86 29.21,21.59
  Bottom 1.524: SENBREAK.1 11.43,78.74 12.7,77.47 46.99,77.47 48.26,76.2 OK2.4 | K1.1 31.75,76.2 | U1.5V@0 118.11,87.63 119.38,86.36 v119.38,59.69 | v137.16,59.69 139.7,57.15 139.7,3.81 138.43,2.54 111.76,2.54 110.49,3.81 RECIVER.1
VIN  (via drill 0.35)
  Top 1.27: v96.52,110.49 v96.52,87.63 | ENCODER.14 v104.14,45.72
  Bottom 1.27: 52.07,110.49 69.85,110.49
  Bottom 1.524: v96.52,87.63 96.52,48.26 99.06,45.72 v104.14,45.72 | v96.52,110.49 52.07,110.49 43.18,110.49 39.37,114.3 39.37,120.65 | 39.37,130.81 39.37,121.92 39.37,120.65 | U$2.IN+ 38.61,121.41 39.37,120.65
  Bottom 2.54: F1.2 39.37,121.92 | 39.37,121.92 39.37,113.03 41.91,110.49 43.18,110.49 61.81,110.49 61.89,110.57 96.86,110.57 96.94,110.49 v96.52,110.49 | U$2.IN+ 20.32,121.92 39.37,121.92
VINS  (via drill 0.35)
  Top 0.762: 116.84,80.01 v138.43,80.01
  Top 1.016: U1.VIN v138.43,80.01
  Bottom 2.54: v138.43,80.01 139.7,81.28 139.7,114.3 135.89,118.11 59.69,118.11 U$2.OUT+